# Altium PCB digitalBlock.PcbDoc
Units mm, origin at the board's own origin, x right, y up, seen from the top; angles counter-clockwise.
Board outline 152.4 x 101.6 mm, 2 copper layers (Top Layer, Bottom Layer); 42 components, 95 nets, 304 pads, 48 vias.
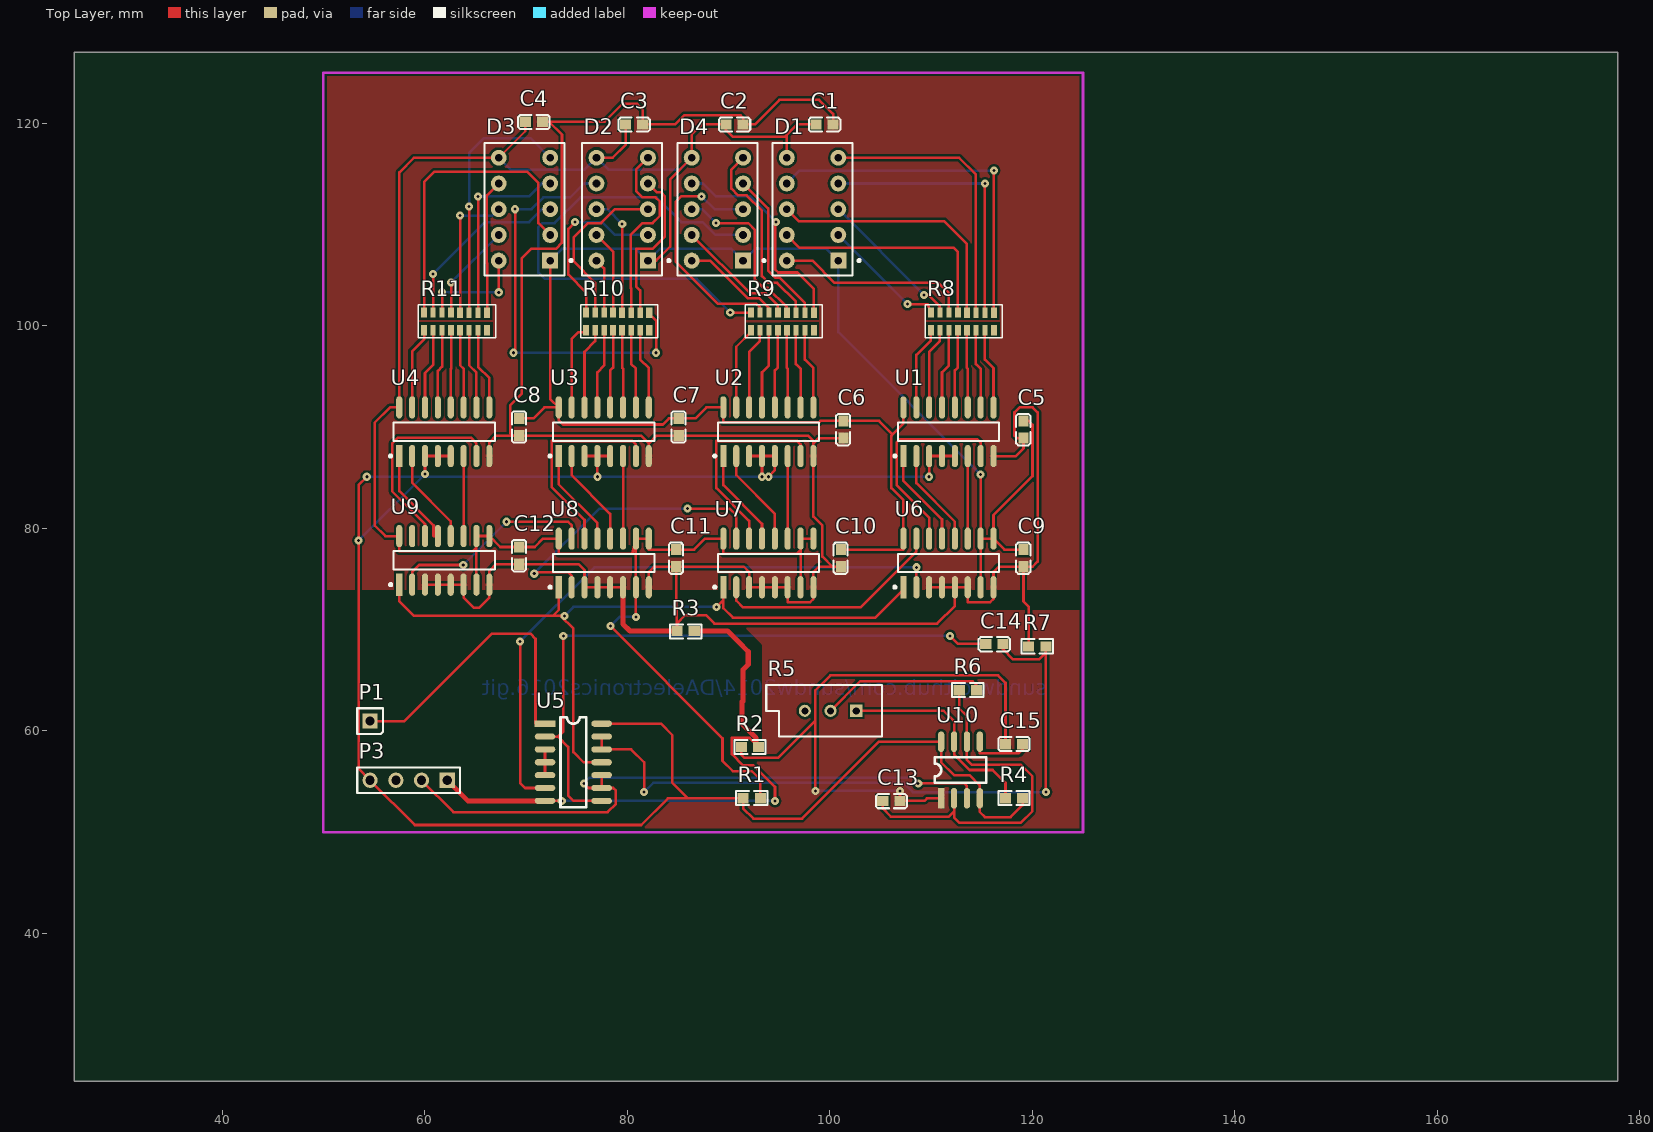
[diagram p0: Top Layer view]
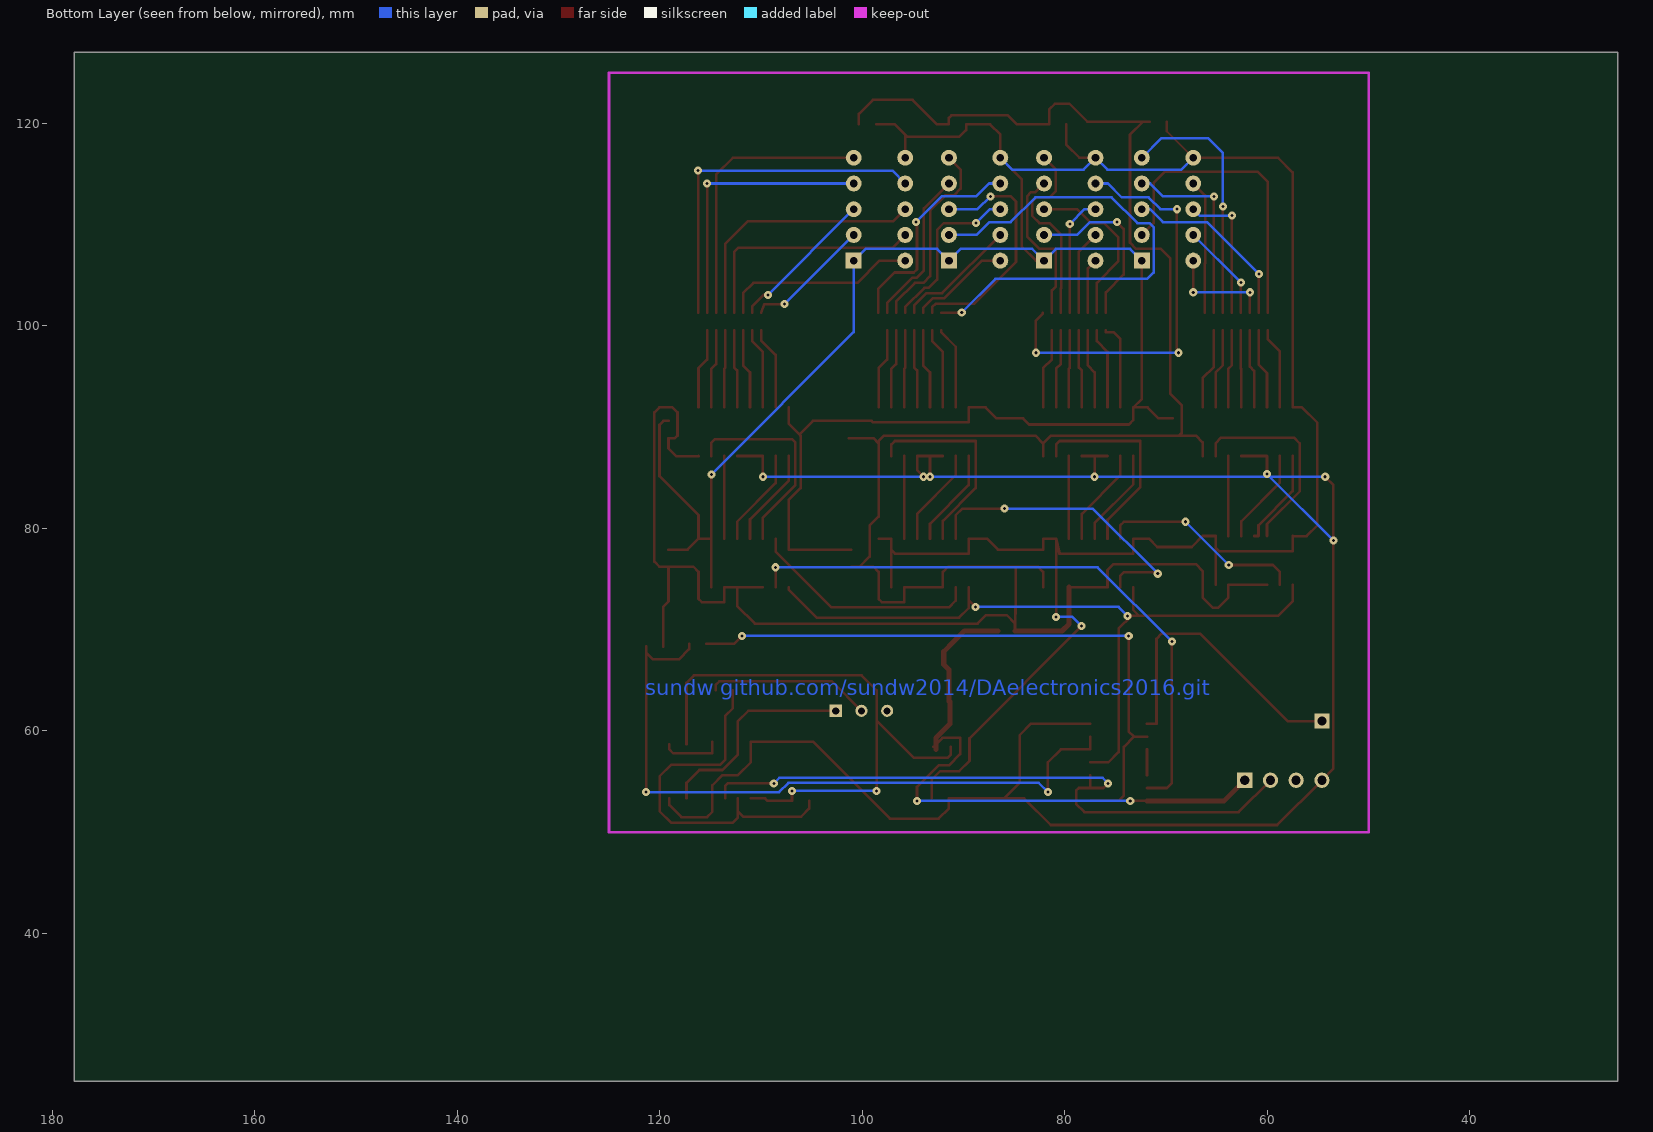
[diagram p1: Bottom Layer view, seen from below]

## Layer stack, top to bottom
Top Solder: solder mask 0.0102, Solder Resist, Dk 3.5
Top Layer: signal copper 0.0356
Dielectric 1: dielectric 0.32, FR-4, Dk 4.8
Bottom Layer: signal copper 0.0356
Bottom Solder: solder mask 0.0102, Solder Resist, Dk 3.5

## Board outline
25.4,25.4 177.8,25.4 177.8,127 25.4,127

## Design rules (kind name [scope] priority, off if disabled: settings)
Clearance [All] p1: gap=0.254
ComponentClearance [All] p1 off: gap=0.254 collisioncheckmode=3 verticalgap=0.254 showdistances=FALSE
Height [All] p1 off: minheight=0 maxheight=25.4 prefheight=12.7
HoleSize [All] p1 off: absolutevalues=TRUE maxlimit=2.54 minlimit=0.025 maxpercent=80.000 minpercent=20.000
HoleToHoleClearance [All] p1 off: gap=0.254 allowstackedmicrovias=TRUE
LayerPairs [All] p1 off: enforce=TRUE
MinimumSolderMaskSliver [All] p1 off: minsoldermaskwidth=0.254
NetAntennae [All] p1 off: netantennaetolerance=0
PasteMaskExpansion [All] p1 off: expansion=0
PlaneClearance [All] p1 off: clearance=0.508
PlaneConnect [All] p1 off: planeconnectstyle=Relief reliefexpansion=0.508 reliefentries=4 reliefconductorwidth=0.254 reliefairgap=0.254
PolygonConnect [All] p1 off: connectstyle=Relief reliefconductorwidth=0.254 reliefentries=4 polygonreliefangle="90 Angle" airgapwidth=0.254
RoutingVias [All] p1: holewidth=0.3 width=0.8 viastyle="Through Hole" minholewidth=0.3 minwidth=0.7 maxholewidth=0.6 maxwidth=1
SilkToBoardRegionClearance [All] p1 off:
SilkToSilkClearance [All] p1 off: silktosilkclearance=0.254
SilkToSolderMaskClearance [IsPad] p1 off: minsilkscreentomaskgap=0.254 clearancetoexposedcopper=TRUE
SolderMaskExpansion [All] p1 off: expansion=0.102
Width [All] p1: maxlimit=0.254 minlimit=0.254 preferedwidth=0.254
17 further rules are at their usual default settings.

## Components (designator, comment, footprint, x,y, rotation, side; value= is the part's Value field where it differs from the comment)
C1 "Cap" CAP-0603 100.33,119.888 r180 top
C2 "Cap" CAP-0603 91.44,119.888 r180 top
C3 "Cap" CAP-0603 81.534,119.888 r180 top
C4 "Cap" CAP-0603 71.628,120.142 r180 top
C5 "Cap" CAP-0603 119.126,88.9 r90 top
C6 "Cap" CAP-0603 101.346,88.9 r90 top
C7 "Cap" CAP-0603 85.09,89.154 r90 top
C8 "Cap" CAP-0603 69.342,89.154 r90 top
C9 "Cap" CAP-0603 119.126,76.2 r90 top
C10 "Cap" CAP-0603 101.092,76.2 r90 top
C11 "Cap" CAP-0603 84.836,76.2 r90 top
C12 "Cap" CAP-0603 69.342,76.454 r90 top
C13 "Cap" CAP-0603 106.934,53.086 r180 top
C14 "Cap" CAP-0603 117.094,68.58 r180 top
C15 "Cap" CAP-0603 117.348,58.674 r0 top
D1 "LEDHex1CP" LEDDIP-10/C5.08RHD 100.838,106.426 r180 top
D2 "LEDHex1CP" LEDDIP-10/C5.08RHD 82.042,106.426 r180 top
D3 "LEDHex1CP" LEDDIP-10/C5.08RHD 72.39,106.426 r180 top
D4 "LEDHex1CP" LEDDIP-10/C5.08RHD 91.44,106.426 r180 top
P1 "Header 1" HDR1*1 54.61,60.96 r0 top
P3 "Header 4" HDR1X4 62.23,55.118 r180 top (schematic designator Zcnect1)
R1 "Res2" RES-0603 91.44,53.34 r0 top
R2 "Res2" RES-0603 92.964,58.42 r180 top
R3 "Res2" RES-0603 86.614,69.85 r180 top
R4 "Res2" RES-0603 117.348,53.34 r0 top
R5 "RPot" VR5 100.076,61.976 r180 top
R6 "Res2" RES-0603 112.776,64.008 r0 top
R7 "Res2" RES-0603 119.634,68.326 r0 top
R8 "Res Pack4" 0603PACK8 109.982,99.568 r90 top
R9 "Res Pack4" 0603PACK8 92.202,99.568 r90 top
R10 "Res Pack4" 0603PACK8 75.946,99.568 r90 top
R11 "Res Pack4" 0603PACK8 59.944,99.568 r90 top
U1 "7447" SO-16 112.268,88.138 r0 top
U2 "7447" SO-16 94.488,88.138 r0 top
U3 "7447" SO-16 78.232,88.138 r0 top
U4 "7447" SO-16 62.484,88.138 r0 top
U5 "SN74AHC00D" SO-14 71.882,60.706 r0 top
U6 "SN74HC160D" SO-16 112.268,75.184 r0 top
U7 "SN74HC160D" SO-16 94.488,75.184 r0 top
U8 "SN74HC160D" SO-16 78.232,75.184 r0 top
U9 "SN74HC160D" SO-16 62.484,75.438 r0 top
U10 "NE555" SO-8 110.998,53.34 r90 top

## Footprints (in the part's own frame and the unit in brackets; to place one, negate y for a bottom-side part, rotate by r counter-clockwise, add the part's x,y. Pads: shape width x height; smd on the part's side, far side on the other; paste and mask are expansions set on the pad)
0603PACK8 [mil]
  rect 40x23.62 smd: 1(-0.09,0) 4(-0.09,-105) 5(0,-140) 8(0,-245) 9(68,-245) 12(68,-140) 13(68.09,-105) 16(68.09,0)
  rect 40x20 smd: 2(-0.09,-35) 3(-0.09,-70) 6(0,-175) 7(0,-210) 10(68,-210) 11(68,-175) 14(68.09,-70) 15(68.09,-35)
  silkscreen extent -30,-278 99,22, body extent 4,-266 67,10, height 21
CAP-0603 [mm]
  rect 1.1x1 smd: 1(0,0) 2(1.7,0)
  silkscreen extent -0.71,-0.67 2.39,0.73
HDR1*1 [mm]
  rect 1.5x1.5 hole 0.9: 1(0,0)
  silkscreen extent -1.27,-1.27 1.27,1.27
HDR1X4 [mm] "Connector; Header; 4 Position"
  rect 1.5x1.5 hole 0.9: 1(0,0)
  round 1.5 hole 0.9: 2(2.54,0) 3(5.08,0) 4(7.62,0)
  silkscreen extent -1.27,-1.27 8.89,1.27
LEDDIP-10/C5.08RHD [mil]
  rect 62x62 hole 30: 1(0,0)
  round 62 hole 30: 2(0,-100) 3(0,-200) 4(0,-300) 5(0,-400) 6(200,-400) 7(200,-300) 8(200,-200) 9(200,-100) 10(200,0)
  silkscreen extent -86,-458 256,58, body extent -56,-458 256,58, height 250
RES-0603 [mm] "1/10W"
  rect 1.1x1 smd: 1(0,0) 2(1.7,0)
  silkscreen extent -0.71,-0.67 2.39,0.73
SO-8 [mil]
  rect 80x24 smd: 1(0,0)
  oval 80x24 smd: 2(0,-50) 3(0,-100) 4(0,-150) 5(220,-150) 6(220,-100) 7(220,-50) 8(220,0)
  silkscreen extent 60,-175 160,25
SO-14 [mil]
  rect 80x24 smd: 1(0,0)
  oval 80x24 smd: 2(0,-50) 3(0,-100) 4(0,-150) 5(0,-200) 6(0,-250) 7(0,-300) 8(220,-300) 9(220,-250) 10(220,-200) 11(220,-150) 12(220,-100) 13(220,-50) 14(220,0)
  silkscreen extent 60,-325 160,25
SO-16 [mm]
  rect 0.6x2.2 smd: 1(-4.995,-1.003)
  oval 0.6x2.2 smd: 2(-3.725,-1.003) 3(-2.455,-1.003) 4(-1.185,-1.003) 5(0.085,-1.003) 6(1.355,-1.003) 7(2.625,-1.003) 8(3.895,-1.003) 9(3.895,3.797) 10(2.625,3.797) 11(1.355,3.797) 12(0.085,3.797) 13(-1.185,3.797) 14(-2.455,3.797) 15(-3.725,3.797) 16(-4.995,3.797)
  silkscreen extent -5.97,-1.13 4.45,2.3, body extent -5.5,-0.55 4.4,3.35, height 1.75
VR5 [mm] "Potentiometer; 3 Leads"
  rect 1.2x1.2 hole 0.7: 1(-2.54,0)
  round 1.2 hole 0.7: 2(0,0) 3(2.54,0)
  silkscreen extent -5.08,-2.54 6.35,2.54

## Part data
C1 C2 C3 C4 C5 C6 C7 C8 C9 C10 C11 C12 C13 C14 C15: "Capacitor"
P3: "Header, 4-Pin"
R1 R2 R3 R4 R6 R7: "Resistor"
R5: "Potentiometer"
R8 R9 R10 R11: "Isolated Resistor Network"
U5: "Quadruple 2-Input Positive-NAND Gate"
U6 U7 U8 U9: "Synchronous 4-Bit Decade and Binary Counter"

## Via types
v1: diameter 0.8, hole 0.3, Top Layer to Bottom Layer, 48 vias

## Nets (pads, with @x,y where several pads share a name; then routed paths per layer and width w, separated by ;. In a path a pad name is that pad's centre, name@x,y a point inside that pad or via, vN(x,y) a via of type N, cw(c..) or ccw(c..) an arc to the next point about the centre after c; other vN are vias at no path point)
AGND: C13.1 C15.1 R2.2 U10.1 | length 59
  Top Layer w0.254: R2.2 91.264,57.631 91.567,57.328 94.894,57.328 98.577,61.011 ; v1(98.577,54.077) 98.577,61.011 ; v1(106.934,54.077) C13.1 109.338,53.086 109.592,53.34 U10.1 ; C15.1 117.348,64.745 116.611,65.481 100.051,65.481 98.577,64.008 98.577,61.011
  Bottom Layer w0.254: v1(98.577,54.077) v1(106.934,54.077)
DGND: C1.1 C2.1 C3.1 C4.1 C5.1 C6.1 C7.1 C8.1 C9.1 C10.1 C11.1 C12.1 R3.2 R7.1 U1.8 U2.8 U3.8 U4.8 U6.3 U6.4 U6.5 U6.6 U6.8 U7.3 U7.4 U7.5 U7.6 U7.8 U8.3 U8.4 U8.5 U8.6 U8.8 U9.3 U9.4 U9.5 U9.6 U9.8 | length 271.1
  Top Layer w0.254: U9.3 U9.4 U9.5 U9.6 63.839,73.152 64.855,72.136 65.363,72.136 66.379,73.152 U9.8 66.379,75.777 67.056,76.454 C12.1 75.184,76.454 75.777,75.861 U8.3 U8.4 U8.5 U8.6 ; U4.8 66.379,88.477 67.056,89.154 68.707,89.154 ; C4.1 72.288,120.142 ; U8.8 82.127,75.692 82.635,76.2 C11.1 ; U3.8 82.127,88.392 ; C1.1 100.33,120.904 98.933,122.301 95.021,122.301 92.608,119.888 C2.1 91.44,120.523 91.186,120.777 85.623,120.777 84.734,119.888 C3.1 81.534,121.361 80.975,121.92 79.553,121.92 77.775,120.142 72.288,120.142 ; C10.1 100.279,76.2 ; C6.1 98.891,88.9 98.383,88.392 ; U6.3 U6.4 U6.5 ; U1.8 116.163,87.122 118.364,87.122 119.126,87.884 C5.1 118.491,88.9 118.237,89.154 118.237,91.44 118.745,91.948 120.015,91.948 120.523,91.44 120.523,76.708 120.015,76.2 C9.1 ; R7.1 119.634,72.263 119.126,72.771 C9.1 ; 68.707,89.154 C8.1 81.365,89.154 82.127,88.392 ; 68.707,89.154 68.453,89.408 68.453,92.151 69.571,93.269 69.571,106.655 70.51,107.594 72.949,107.594 73.558,108.204 73.558,118.872 72.288,120.142 ; 82.127,88.392 82.889,89.154 C7.1 97.849,89.154 98.383,88.621 98.383,88.392 ; C11.1 84.836,73.103 R3.2 84.914,70.612 85.727,71.425 87.757,71.425 88.595,70.587 110.592,70.587 112.353,72.348 U6.5 ; C11.1 91.525,76.2 92.033,75.692 U7.3 U7.4 U7.5 U7.6 95.843,72.695 98.044,72.695 98.383,73.033 U7.8 98.383,75.692 98.891,76.2 100.279,76.2 ; 98.383,88.392 U2.8 98.383,81.145 99.263,80.264 99.263,77.216 100.279,76.2 ; U6.5 U6.6 113.623,72.695 115.824,72.695 116.163,73.033 U6.8 116.163,75.692 116.671,76.2 C9.1
  Top Layer w0.5: U8.6 79.587,70.527 80.264,69.85 R3.2
FIN: P1.1 U5.1 | length 29.4
  Top Layer w0.254: P1.1 57.988,60.96 66.624,69.596 70.434,69.596 70.942,69.088 70.942,60.706 U5.1
GND: P3.1 R2.1 R3.1 U5.7 | length 61.4
  Top Layer w0.254: U5.7 v1(73.533,53.086) ; R2.1 92.075,59.309 90.322,59.309 90.322,57.709 91.44,56.591 92.456,56.591 94.59,54.458 v1(94.59,53.086)
  Top Layer w0.5: P3.1 64.262,53.086 U5.7 ; R3.1 89.916,69.85 90.932,68.834 91.948,67.818 91.948,66.548 91.44,66.04 91.44,62.897 ; 91.345,62.897 91.345,60.674 92.71,59.309 R2.1@92.71,58.166
  Bottom Layer w0.254: v1(73.533,53.086) v1(94.59,53.086)
NetC13_2: C13.2 R6.1 U10.2 U10.6 | length 36.4
  Top Layer w0.254: C13.2 105.234,52.322 106.02,51.537 111.76,51.537 112.268,52.045 ; U10.2 112.268,52.045 ; R6.1 112.776,62.23 113.538,61.468 U10.6 113.538,57.125 114.021,56.642 118.872,56.642 119.99,55.524 119.99,52.045 118.872,50.927 112.776,50.927 112.268,51.435 112.268,52.045
NetC14_1: C14.1 R7.2 U5.12 U5.13 | length 69.2
  Top Layer w0.254: U5.13 U5.12 80.391,58.166 81.661,56.896 v1(81.661,53.95) ; C14.1 117.094,68.072 118.11,67.056 120.65,67.056 121.334,67.74 ; v1(121.334,53.95) 121.334,67.74 ; R7.2 121.334,67.74
  Bottom Layer w0.254: v1(81.661,53.95) 82.569,54.858 107.296,54.858 108.204,53.95 v1(121.334,53.95)
NetC14_2: C14.2 U5.2 U5.8 | length 63.2
  Top Layer w0.254: U5.2 73.177,59.436 ; v1(73.685,69.367) 73.685,59.944 73.177,59.436 ; U5.8 74.676,53.086 74.168,53.594 74.168,58.42 73.177,59.436 ; v1(111.862,69.367) 112.649,68.58 C14.2
  Bottom Layer w0.254: v1(73.685,69.367) v1(111.862,69.367)
NetC15_2: C15.2 U10.5 | length 6
  Top Layer w0.254: U10.5 114.808,57.785 118.667,57.785 119.048,58.166 C15.2
NetD1_2: D1.2 R8.16 | length 12.6
  Top Layer w0.254: v1(107.671,102.133) 109.677,102.133 R8.16
  Bottom Layer w0.254: D1.2 v1(107.671,102.133)
NetD1_3: D1.3 R8.15 | length 14.6
  Top Layer w0.254: v1(109.309,103.035) 109.728,103.035 110.871,101.892 R8.15
  Bottom Layer w0.254: D1.3 v1(109.309,103.035)
NetD1_4: D1.4 R8.10 | length 27.2
  Top Layer w0.254: R8.10 v1(115.316,114.046)
  Bottom Layer w0.254: D1.4 v1(115.316,114.046)
NetD1_5: D1.5 R8.11 | length 27.9
  Top Layer w0.254: D1.5 112.776,116.586 114.427,114.935 R8.11
NetD1_7: D1.7 R8.9 | length 35
  Top Layer w0.254: R8.9 v1(116.205,115.316)
  Bottom Layer w0.254: D1.7 97.028,115.316 v1(116.205,115.316)
NetD1_8: D1.8 R8.12 | length 26
  Top Layer w0.254: D1.8 96.926,110.338 111.264,110.338 113.538,108.064 R8.12
NetD1_9: D1.9 R8.13 | length 23.6
  Top Layer w0.254: D1.9 97.028,107.696 112.243,107.696 112.649,107.29 R8.13
NetD1_10: D1.10 R8.14 | length 19.3
  Top Layer w0.254: D1.10 98.298,106.426 100.482,104.242 110.744,104.242 111.76,103.226 R8.14
NetD2_2: D2.2 R10.16 | length 17.7
  Top Layer w0.254: v1(74.858,110.236) 74.191,109.57 74.191,105.056 75.946,103.302 R10.16
  Bottom Layer w0.254: v1(74.858,110.236) 77.527,110.236 78.797,108.966 D2.2
NetD2_3: D2.3 R10.15 | length 16.8
  Top Layer w0.254: R10.15 76.835,104.242 74.701,106.375 74.701,108.712 76.124,110.134 77.407,110.134 78.778,111.506 D2.3
NetD2_4: D2.4 R10.10 | length 16
  Top Layer w0.254: R10.10 81.28,103.48 80.874,103.886 80.874,107.594 82.499,107.594 83.718,108.814 83.718,112.776 83.312,113.182 82.906,113.182 D2.4
NetD2_5: D2.5 R10.11 | length 19.3
  Top Layer w0.254: R10.11 80.391,103.683 80.366,103.708 80.366,108.991 81.509,110.134 82.499,110.134 83.21,110.846 83.21,112.268 82.804,112.674 81.483,112.674 80.874,113.284 80.874,115.418 D2.5
NetD2_7: D2.7 R10.9 | length 41.6
  Top Layer w0.254: v1(68.783,97.333) 68.936,97.485 v1(68.936,111.506) ; R10.9 82.169,101.194 82.855,100.508 v1(82.855,97.333)
  Bottom Layer w0.254: v1(68.783,97.333) v1(82.855,97.333) ; v1(68.936,111.506) 70.561,111.506 71.73,112.674 74.371,112.674 75.743,114.046 D2.7
NetD2_8: D2.8 R10.12 | length 11.9
  Top Layer w0.254: R10.12 v1(79.502,110.058)
  Bottom Layer w0.254: D2.8 78.054,111.506 v1(79.502,110.058)
NetD2_9: D2.9 R10.13 | length 8.4
  Top Layer w0.254: D2.9 78.613,107.315 R10.13
NetD2_10: D2.10 R10.14 | length 5.4
  Top Layer w0.254: D2.10 77.724,105.664 R10.14
NetD3_2: D3.2 R11.16 | length 30.7
  Top Layer w0.254: R11.16 59.944,114.198 60.96,115.214 70.104,115.214 71.222,114.097 71.222,110.134 D3.2
NetD3_3: D3.3 R11.15 | length 18
  Top Layer w0.254: R11.15 v1(60.833,105.112)
  Bottom Layer w0.254: v1(60.833,105.112) 65.957,110.236 70.307,110.236 71.577,111.506 D3.3
NetD3_4: D3.4 R11.10 | length 19.1
  Top Layer w0.254: R11.10 v1(65.278,112.776)
  Bottom Layer w0.254: v1(65.278,112.776) 70.307,112.776 71.577,114.046 D3.4
NetD3_5: D3.5 R11.11 | length 25.2
  Top Layer w0.254: R11.11 v1(64.389,111.785)
  Bottom Layer w0.254: v1(64.389,111.785) 64.389,117.069 65.837,118.516 70.46,118.516 D3.5
NetD3_7: D3.7 R11.9 | length 13.2
  Top Layer w0.254: R11.9 66.167,106.172 66.142,106.197 66.142,112.878 D3.7
NetD3_8: D3.8 R11.12 | length 13.6
  Top Layer w0.254: R11.12 v1(63.5,110.871)
  Bottom Layer w0.254: v1(63.5,110.871) 66.675,110.871 D3.8
NetD3_9: D3.9 R11.13 | length 9.6
  Top Layer w0.254: R11.13 v1(62.611,104.267)
  Bottom Layer w0.254: v1(62.611,104.267) D3.9
NetD3_10: D3.10 R11.14 | length 10.7
  Top Layer w0.254: R11.14 v1(61.722,103.302) ; v1(67.31,103.302) D3.10
  Bottom Layer w0.254: v1(61.722,103.302) v1(67.31,103.302)
NetD4_2: D4.2 R9.16 | length 50.1
  Top Layer w0.254: v1(90.17,101.295) 92.202,101.295 R9.16
  Bottom Layer w0.254: v1(90.17,101.295) 86.843,104.623 71.857,104.623 71.222,105.258 71.222,109.728 71.628,110.134 72.822,110.134 75.362,112.674 82.906,112.674 85.344,110.236 87.427,110.236 88.697,108.966 D4.2
NetD4_3: D4.3 R9.15 | length 24
  Top Layer w0.254: v1(87.351,112.776) 85.319,112.776 84.811,112.268 84.811,106.299 88.923,102.187 92.733,102.187 93.091,101.829 R9.15
  Bottom Layer w0.254: v1(87.351,112.776) 88.621,111.506 D4.3
NetD4_4: D4.4 R9.10 | length 15.5
  Top Layer w0.254: D4.4 93.904,111.582 93.904,105.454 94.612,104.746 95.025,104.746 97.536,102.235 R9.10
NetD4_5: D4.5 R9.11 | length 19.4
  Top Layer w0.254: D4.5 90.272,115.418 90.272,113.538 90.932,112.878 91.796,112.878 93.286,111.387 93.286,104.91 93.959,104.238 94.797,104.238 96.647,102.387 R9.11
NetD4_7: D4.7 R9.9 | length 21.6
  Top Layer w0.254: v1(94.691,110.236) 94.59,110.134 94.59,105.573 94.909,105.254 96.803,105.254 98.425,103.632 R9.9
  Bottom Layer w0.254: D4.7 87.478,114.046 88.748,112.776 92.151,112.776 v1(94.691,110.236)
NetD4_8: D4.8 R9.12 | length 16.8
  Top Layer w0.254: v1(88.748,110.134) 91.948,110.134 92.608,109.474 92.608,104.568 93.447,103.73 93.871,103.73 95.758,101.843 R9.12
  Bottom Layer w0.254: D4.8 87.376,111.506 v1(88.748,110.134)
NetD4_9: D4.9 R9.13 | length 12.1
  Top Layer w0.254: D4.9 92.104,103.222 93.661,103.222 94.869,102.014 R9.13
NetD4_10: D4.10 R9.14 | length 10
  Top Layer w0.254: D4.10 88.182,106.426 91.913,102.695 93.038,102.695 93.98,101.752 R9.14
NetR4_1: R4.1 R5.1 U10.7 | length 21.1
  Top Layer w0.254: R5.1 111.252,61.976 112.268,60.96 U10.7 112.268,57.658 113.792,56.134 116.078,56.134 117.348,54.864 R4.1
NetR5_3: R5.2 R6.2 | length 16.3
  Top Layer w0.254: R5.2 102.997,64.897 114.095,64.897 114.476,64.516 R6.2
NetR8_1: R8.3 U1.13 | length 7.9
  Top Layer w0.254: U1.13 111.083,95.402 111.76,96.08 R8.3
NetR8_2: R8.4 U1.12 | length 7.8
  Top Layer w0.254: U1.12 112.353,95.58 112.649,95.877 R8.4
NetR8_3: R8.5 U1.11 | length 7.7
  Top Layer w0.254: R8.5 113.538,95.843 113.623,95.758 U1.11
NetR8_4: R8.6 U1.10 | length 7.8
  Top Layer w0.254: R8.6 114.427,96.224 114.893,95.758 U1.10
NetR8_5: R8.7 U1.9 | length 8
  Top Layer w0.254: R8.7 115.316,96.655 116.163,95.809 U1.9
NetR8_6: R8.1 U1.15 | length 8.2
  Top Layer w0.254: U1.15 108.543,97.113 109.982,98.552 R8.1
NetR8_7: R8.2 U1.14 | length 8.1
  Top Layer w0.254: U1.14 109.813,97.417 110.871,98.476 R8.2
NetR9_1: R9.3 U2.13 | length 7.9
  Top Layer w0.254: U2.13 93.303,95.402 93.98,96.08 R9.3
NetR9_2: R9.4 U2.12 | length 7.8
  Top Layer w0.254: U2.12 94.573,95.58 94.869,95.877 R9.4
NetR9_3: R9.5 U2.11 | length 7.7
  Top Layer w0.254: R9.5 95.758,95.843 95.843,95.758 U2.11
NetR9_4: R9.6 U2.10 | length 7.8
  Top Layer w0.254: R9.6 96.647,96.224 97.113,95.758 U2.10
NetR9_5: R9.7 U2.9 | length 8
  Top Layer w0.254: R9.7 97.536,96.655 98.383,95.809 U2.9
NetR9_6: R9.1 U2.15 | length 8.2
  Top Layer w0.254: U2.15 90.763,97.925 92.202,99.365 R9.1
NetR9_7: R9.2 U2.14 | length 8.1
  Top Layer w0.254: U2.14 92.033,97.417 93.091,98.476 R9.2
NetR10_1: R10.3 U3.13 | length 7.9
  Top Layer w0.254: U3.13 77.047,95.402 77.724,96.08 R10.3
NetR10_2: R10.4 U3.12 | length 7.8
  Top Layer w0.254: U3.12 78.317,95.58 78.613,95.877 R10.4
NetR10_3: R10.5 U3.11 | length 7.7
  Top Layer w0.254: R10.5 79.502,95.843 79.587,95.758 U3.11
NetR10_4: R10.6 U3.10 | length 7.8
  Top Layer w0.254: R10.6 80.391,96.224 80.857,95.758 U3.10
NetR10_5: R10.7 U3.9 | length 8
  Top Layer w0.254: R10.7 81.28,96.655 82.127,95.809 U3.9
NetR10_6: R10.1 U3.15 | length 8.7
  Top Layer w0.254: U3.15 74.507,98.687 75.184,99.365 75.946,99.365 R10.1
NetR10_7: R10.2 U3.14 | length 8.1
  Top Layer w0.254: U3.14 75.777,97.417 76.835,98.476 R10.2
NetR11_1: R11.3 U4.13 | length 7.8
  Top Layer w0.254: U4.13 61.299,95.529 61.722,95.953 R11.3
NetR11_2: R11.4 U4.12 | length 7.6
  Top Layer w0.254: U4.12 62.569,95.707 62.611,95.75 R11.4
NetR11_3: R11.5 U4.11 | length 7.8
  Top Layer w0.254: R11.5 63.5,96.097 63.839,95.758 U4.11
NetR11_4: R11.6 U4.10 | length 7.9
  Top Layer w0.254: R11.6 64.389,96.097 65.109,95.377 U4.10
NetR11_5: R11.7 U4.9 | length 8.1
  Top Layer w0.254: R11.7 65.278,95.936 66.379,94.835 U4.9
NetR11_6: R11.1 U4.15 | length 8.1
  Top Layer w0.254: U4.15 58.759,97.468 59.944,98.654 R11.1
NetR11_7: R11.2 U4.14 | length 8
  Top Layer w0.254: U4.14 60.029,95.326 60.833,96.131 R11.2
NetU1_1: U1.1 U6.13 | length 9.7
  Top Layer w0.254: U1.1 107.273,84.686 111.083,80.876 U6.13
NetU1_2: U1.2 U6.12 | length 9.7
  Top Layer w0.254: U1.2 108.543,84.455 112.353,80.645 U6.12
NetU1_6: U1.6 U6.11 | length 8.2
  Top Layer w0.254: U6.11 U1.6
NetU1_7: U1.7 U6.14 | length 20.7
  Top Layer w0.254: U6.14 109.813,81.043 106.592,84.264 106.592,88.456 106.934,88.798 114.554,88.798 114.893,88.46 U1.7
NetU2_1: U2.1 U7.13 | length 9.7
  Top Layer w0.254: U2.1 89.493,84.252 93.303,80.442 U7.13
NetU2_2: U2.2 U7.12 | length 9.7
  Top Layer w0.254: U2.2 90.763,85.242 94.573,81.432 U7.12
NetU2_6: U2.6 U7.11 | length 8.2
  Top Layer w0.254: U7.11 U2.6
NetU2_7: U2.7 U7.14 | length 20.6
  Top Layer w0.254: U7.14 92.033,80.738 88.798,83.972 88.798,88.621 96.774,88.621 97.113,88.282 U2.7
NetU3_1: U3.1 U8.13 | length 9.7
  Top Layer w0.254: U3.1 73.237,84.328 77.047,80.518 U8.13
NetU3_2: U3.2 U8.12 | length 9.7
  Top Layer w0.254: U3.2 74.507,85.242 78.317,81.432 U8.12
NetU3_6: U3.6 U8.11 | length 8.2
  Top Layer w0.254: U8.11 U3.6
NetU3_7: U3.7 U8.14 | length 20.6
  Top Layer w0.254: U8.14 75.777,80.84 72.542,84.074 72.542,88.621 80.518,88.621 80.857,88.282 U3.7
NetU4_1: U4.1 U9.13 | length 9.7
  Top Layer w0.254: U4.1 57.489,83.668 60.867,80.289 60.867,79.235 U9.13
NetU4_2: U4.2 U9.12 | length 9.5
  Top Layer w0.254: U4.2 58.759,84.506 62.569,80.696 U9.12
NetU4_6: U4.6 U9.11 | length 7.9
  Top Layer w0.254: U9.11 U4.6
NetU4_7: U4.7 U9.14 | length 20.5
  Top Layer w0.254: U9.14 60.029,80.408 56.794,83.642 56.794,88.392 57.353,88.951 64.55,88.951 65.109,88.392 U4.7
NetU5_3: U5.3 U5.4 U5.5 | length 2.5
  Top Layer w0.254: U5.5 U5.4 U5.3
NetU5_6: U5.6 U6.2 | length 60.8
  Top Layer w0.254: v1(69.418,68.809) 69.418,54.864 69.926,54.356 U5.6 ; U6.2 v1(108.543,76.149)
  Bottom Layer w0.254: v1(69.418,68.809) 76.759,76.149 v1(108.543,76.149)
NetU5_9: P3.2 U5.9 U5.10 U10.3 | length 66.4
  Top Layer w0.254: P3.2 62.83,51.978 78.063,51.978 78.867,52.781 78.867,54.102 78.613,54.356 U5.9 ; v1(75.717,54.813) 76.175,54.356 U5.9 ; U5.10 U5.9 ; v1(108.73,54.813) 113.284,54.813 113.538,54.559 U10.3
  Bottom Layer w0.254: v1(75.717,54.813) 76.27,55.366 108.177,55.366 v1(108.73,54.813)
NetU5_11: U5.11 U6.1 U7.1 U8.1 U9.1 | length 76.8
  Top Layer w0.254: U9.1 57.489,72.788 58.928,71.349 72.644,71.349 ; U8.1 73.237,71.941 72.644,71.349 ; v1(73.787,71.349) v1@73.431,71.349 ; U5.11 75.692,56.896 74.676,57.912 74.676,70.104 v1@73.431,71.349 ; v1(88.798,72.238) 89.493,72.932 ; U7.1 89.493,72.932 ; U6.1 107.273,73.948 104.496,71.171 90.424,71.171 89.493,72.102 89.493,72.932 ; 72.644,71.349 v1@73.431,71.349
  Bottom Layer w0.254: v1(73.787,71.349) 74.676,72.238 v1(88.798,72.238)
NetU6_15: U6.15 U7.2 | length 22.9
  Top Layer w0.254: U7.2 90.763,72.864 91.44,72.187 103.022,72.187 108.543,77.707 U6.15
NetU7_15: U7.15 U8.2 | length 30.2
  Top Layer w0.254: v1(70.815,75.514) 70.968,75.667 74.168,75.667 74.507,75.328 U8.2 ; v1(85.954,81.94) 90.112,81.94 90.763,81.29 U7.15
  Bottom Layer w0.254: v1(70.815,75.514) 77.241,81.94 v1(85.954,81.94)
NetU8_15: U8.15 U9.2 | length 20.5
  Top Layer w0.254: U9.2 58.759,75.7 59.436,76.378 v1(63.805,76.378) ; v1(68.072,80.645) 74.168,80.645 74.507,80.306 U8.15
  Bottom Layer w0.254: v1(63.805,76.378) v1(68.072,80.645)
VCC: P3.4 R1.1 R4.2 U1.3 U1.4 U1.5 U2.3 U2.4 U2.5 U3.3 U3.4 U3.5 U4.3 U4.4 U4.5 U5.14 U10.4 U10.8 | length 209.2
  Top Layer w0.254: v1(54.28,85.09) 53.467,84.277 v1(53.467,78.782) 53.467,56.261 P3.4 59.03,50.698 81.382,50.698 84.023,53.34 85.979,53.34 ; v1(60.029,85.344) U4.3 U4.4 U4.5 ; U3.3 U3.4 ; v1(77.047,85.09) U3.4 ; U5.14 83.312,60.706 84.455,59.563 84.455,54.864 85.979,53.34 ; U3.5 U3.4 ; U2.3 U2.4 ; v1(93.303,85.09) U2.4 ; v1(93.929,85.09) 94.573,85.733 U2.5 U2.4 ; v1(109.813,85.09) U1.3 U1.4 U1.5 ; R4.2 119.048,52.678 117.856,51.486 115.316,51.486 114.808,51.994 U10.4 114.808,54.61 113.792,55.626 112.268,55.626 110.998,56.896 U10.8 104.851,58.928 97.257,51.333 92.456,51.333 91.44,52.349 R1.1 85.979,53.34
  Bottom Layer w0.254: v1(53.467,78.782) v1@59.775,85.09 ; v1(54.28,85.09) v1@59.775,85.09 ; v1(60.029,85.344) v1@59.775,85.09 ; v1(109.813,85.09) v1(93.929,85.09) v1(93.303,85.09) v1(77.047,85.09) 60.029,85.09 v1@59.775,85.09
VDD: C1.2 C2.2 C3.2 C4.2 C5.2 C6.2 C7.2 C8.2 C9.2 C10.2 C11.2 C12.2 D1.1 D1.6 D2.1 D2.6 D3.1 D3.6 D4.1 D4.6 R1.2 U1.16 U2.16 U3.16 U4.16 U6.7 U6.9 U6.10 U6.16 U7.7 U7.9 U7.10 U7.16 U8.7 U8.9 U8.10 U8.16 U9.7 U9.9 U9.10 U9.16 | length 371
  Top Layer w0.254: U9.16 U9.16@57.489,79.223 ; U4.16 U4.16@57.489,91.948 ; U9.7 65.109,78.088 ; C8.2 70.739,90.854 71.82,91.935 U3.16 ; C4.2 69.928,119.204 D3.6 58.928,116.586 57.489,115.147 U4.16@57.489,91.948 ; D3.1 72.39,92.782 U3.16 ; D2.6 78.564,116.586 79.834,117.856 C3.2 ; v1(78.334,70.333) 89.408,59.258 89.408,57.023 90.424,56.007 92.302,56.007 93.14,55.169 R1.2 ; v1(80.857,71.247) U8.7 U8.10 ; D2.1 82.855,106.426 84.226,107.798 84.226,114.452 D4.6 86.36,118.872 87.376,119.888 C2.2 89.74,119.327 90.424,118.643 95.529,118.643 95.758,118.872 ; D1.6 95.758,118.872 ; U7.7 97.113,77.834 ; U7.9 U7.10 97.113,77.834 ; C1.2 96.774,119.888 95.758,118.872 ; C10.2 102.005,77.876 107.273,77.876 U6.16 107.273,82.779 106.07,83.981 106.07,89.124 106.212,89.266 ; U1.16 107.273,90.326 106.212,89.266 ; U6.7 U6.10 ; v1(114.893,85.31) U6.10 ; C9.2 117.244,77.9 U6.9 ; C5.2 119.634,90.6 120.015,90.219 120.015,85.141 116.163,81.288 U6.9 ; U9.16@57.489,79.223 57.489,77.749 64.77,77.749 65.109,78.088 ; U9.16@57.489,79.223 56.109,79.223 55.067,80.264 55.067,90.424 56.591,91.948 U4.16@57.489,91.948 ; 65.109,78.088 U9.10 U9.9 67.46,78.154 C12.2 70.866,78.154 71.693,78.981 U8.16 73.237,77.495 80.518,77.495 U8.10 ; U3.16 73.237,90.67 73.66,90.246 83.515,90.246 84.123,90.854 C7.2 86.741,90.854 87.822,91.935 U2.16 89.493,90.449 98.935,90.449 99.085,90.6 C6.2 104.878,90.6 106.212,89.266 ; U8.10 U8.9 82.127,77.9 C11.2 86.614,77.9 87.695,78.981 U7.16 89.493,77.495 96.774,77.495 97.113,77.834 ; U6.10 U6.9
  Bottom Layer w0.254: D3.6 68.478,115.418 75.794,115.418 D2.6 78.13,115.418 85.192,115.418 D4.6 ; D3.1 73.558,107.594 80.874,107.594 D2.1 83.21,107.594 90.272,107.594 D4.1 92.608,107.594 99.67,107.594 D1.1 100.838,99.365 v1(114.893,85.31) ; v1(78.334,70.333) 79.248,71.247 v1(80.857,71.247)
pads on no net: P3.3 R5.3 R8.8 R9.8 R10.8 R11.8 U9.15

## Polygon pours and split planes (outlines as drawn)
DGND on Top Layer "Top Layer-No Net" (solid, remove dead copper, pour order 4): 35.306,135.382 40.386,130.302 148.844,130.302 148.844,78.486 139.7,69.342 135.128,73.914 40.132,73.914 38.862,73.914 34.036,78.74
AGND on Top Layer "Top Layer-No Net" (solid, remove dead copper, pour order 2): 46.99,71.628 47.244,71.882 134.112,71.882 134.112,42.164 133.096,41.148 131.064,39.116 41.656,39.116 41.656,40.386 41.91,40.64

## Keep-outs
Keep-Out Layer:
  lines w0.254: 50,50 100,50 125,50 125,125 50,125 50,100 50,50

## Other copper
Bottom Layer:
  text "sundw github.com/sundw2014/DAelectronics2016.git" at 121.412,63.5 h1.52